# Altium PCB SAMD21J17A DEV BOARD.PcbDoc
Units mm, origin at the board's own origin, x right, y up, seen from the top; angles counter-clockwise.
Board outline 21 x 67.5 mm, 4 copper layers (Top Layer, GND, POWER, Bottom Layer), stack 0.603 mm thick; 30 components, 64 nets, 204 pads, 90 vias.
Unrouted connection lines stored in the file: 1.
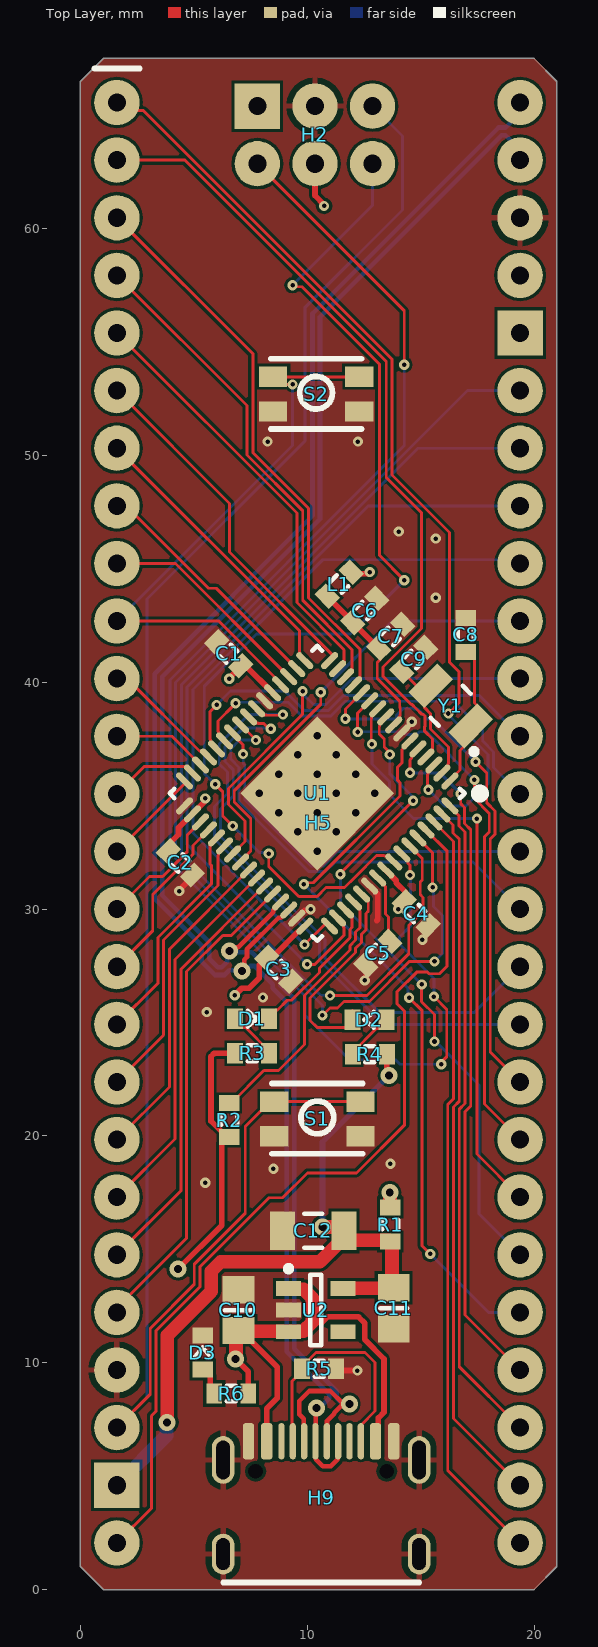
[diagram p0: Top Layer view]
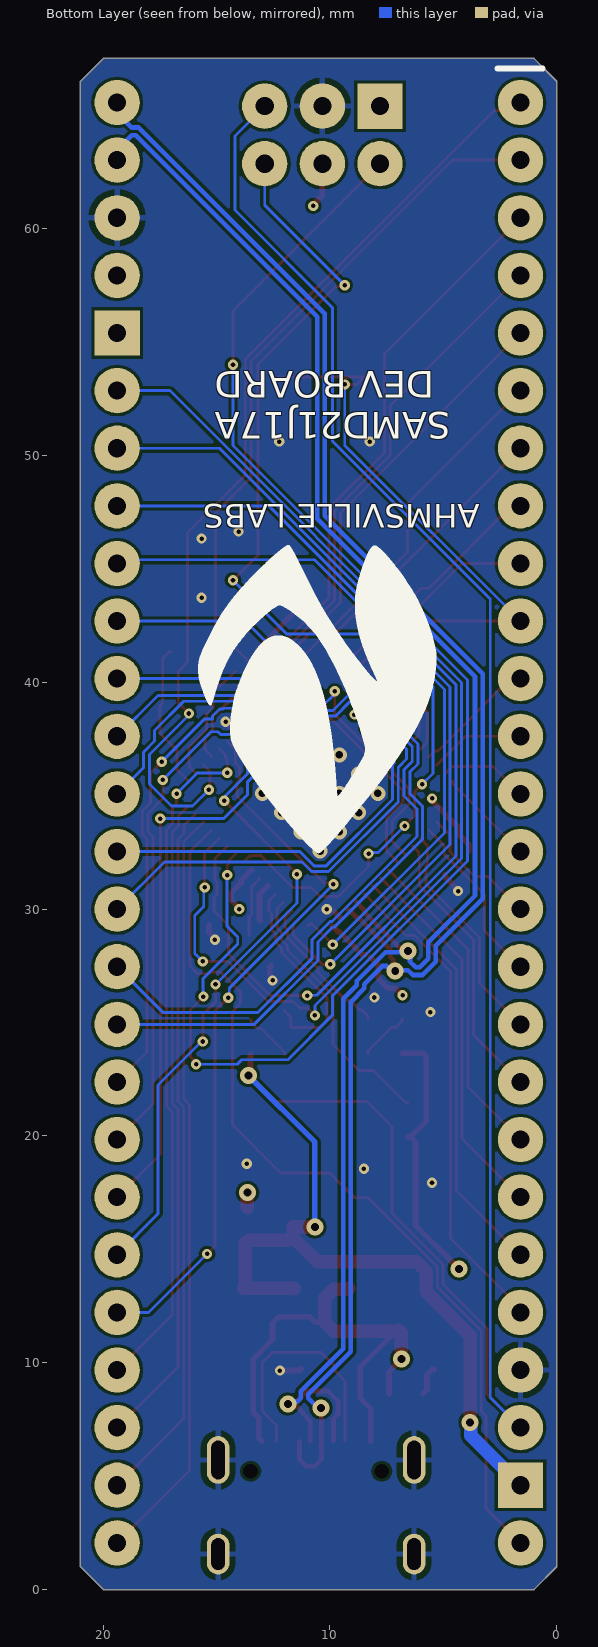
[diagram p1: Bottom Layer view, seen from below]
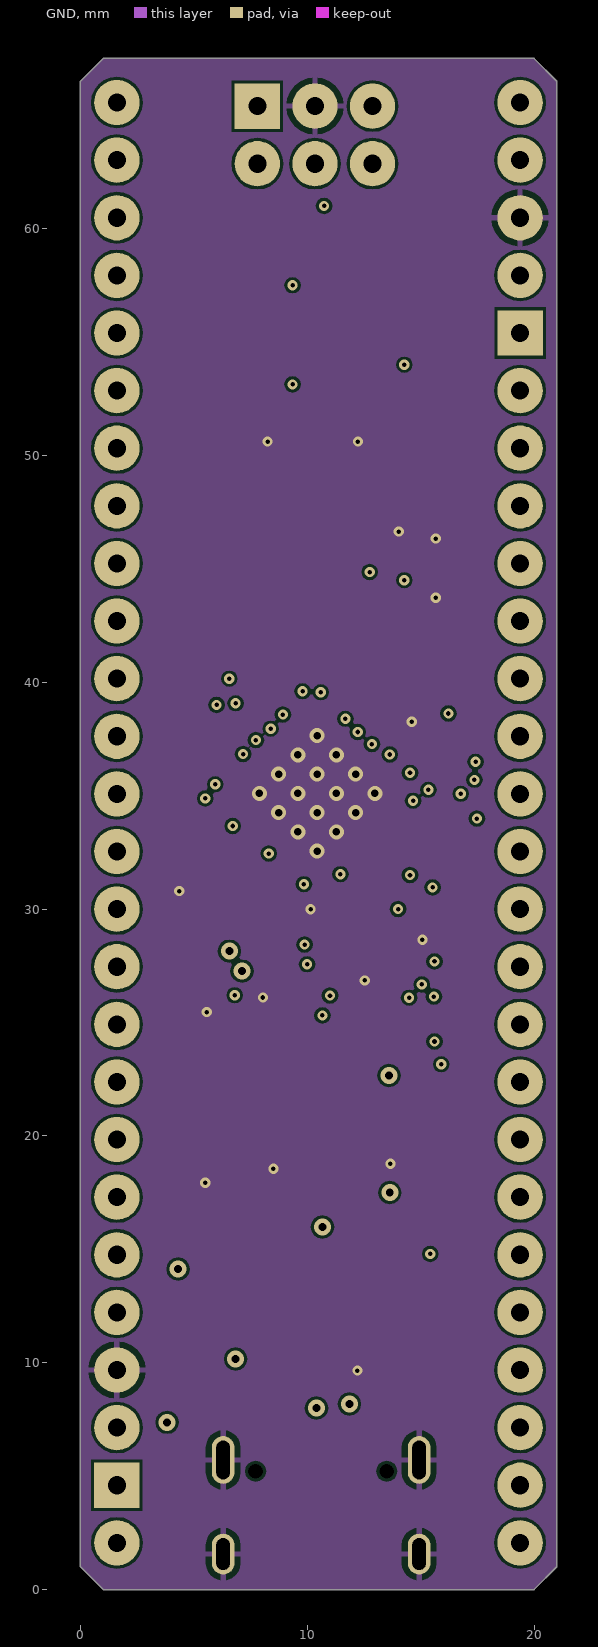
[diagram p2: GND]
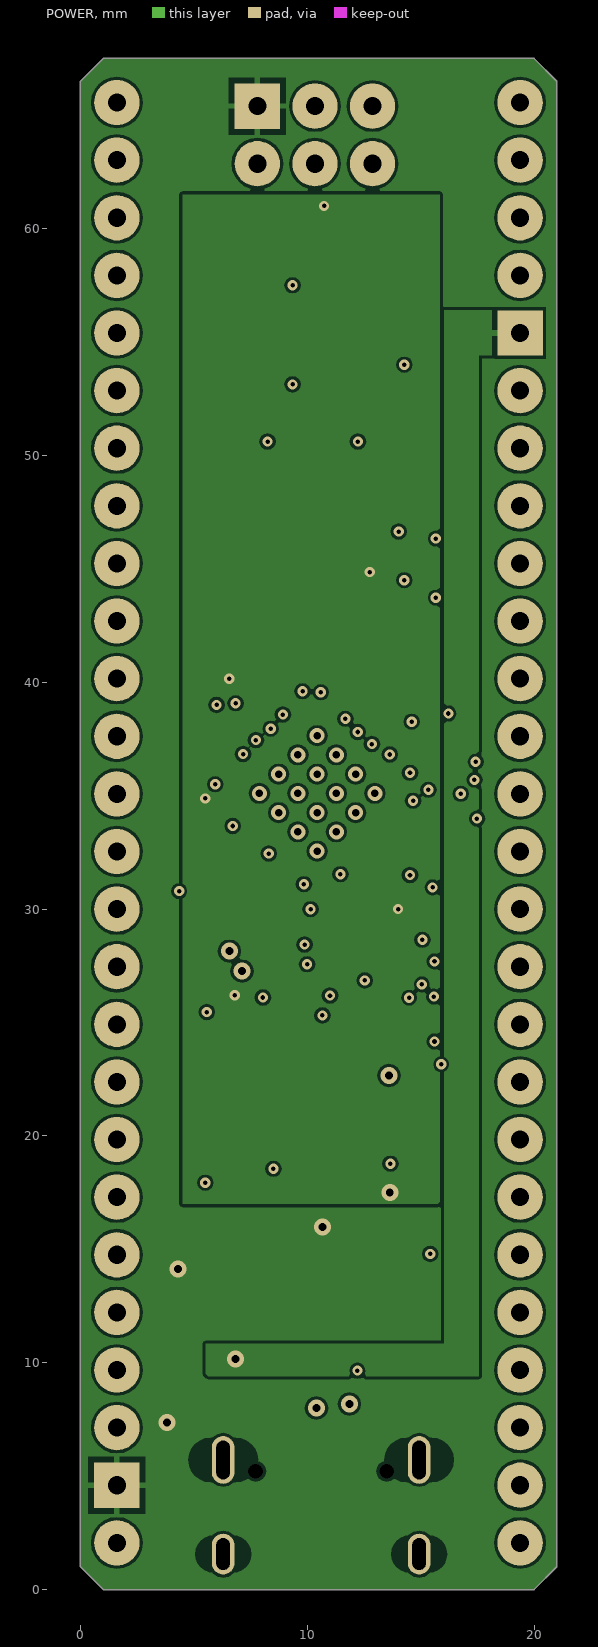
[diagram p3: POWER]
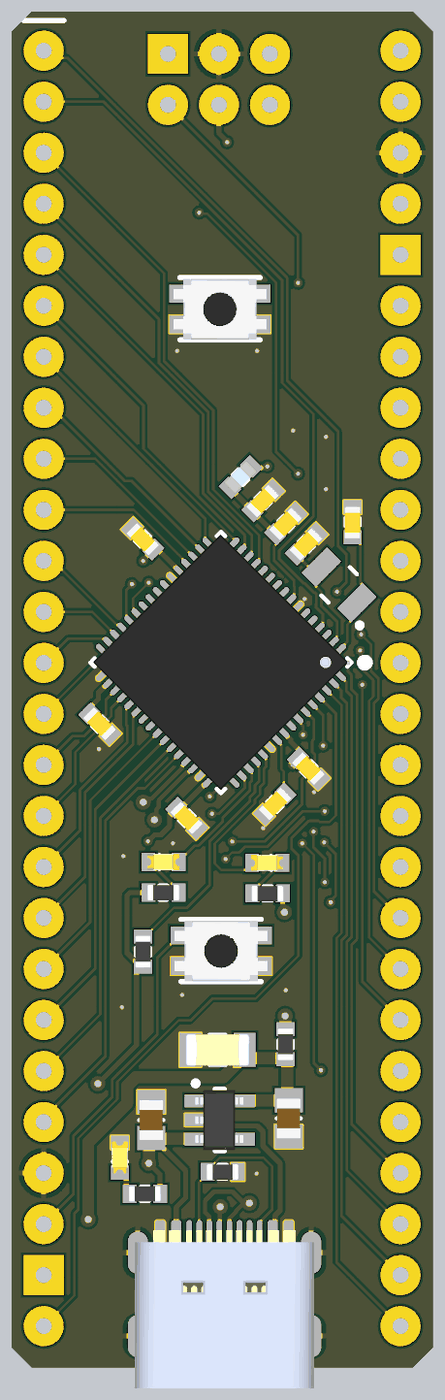
[diagram p4: 3D render of the assembled board from above, using the file's embedded part models]

## Layer stack, top to bottom
Top Solder: solder mask 0.0102, Solder Resist, Dk 3.5
Top Layer: signal copper 0.0356
Dielectric 2: prepreg 0.0711, PP-006, Dk 4.1
GND: signal copper 0.035
Dielectric 1: dielectric 0.32, FR-4, Dk 4.8
POWER: signal copper 0.035
Dielectric 3: prepreg 0.0711, PP-006, Dk 4.1
Bottom Layer: signal copper 0.0356
Bottom Solder: solder mask 0.0102, Solder Resist, Dk 3.5

## Board outline
0,1 0,66.5 1,67.5 20,67.5 21,66.5 21,1 20,0 1,0

## Design rules (kind name [scope] priority, off if disabled: settings)
Clearance [All] p1: gap=0.127 ignorepadtopadclearanceinfootprint=FALSE except(0.2: Arc-SMDPad Track-SMDPad; 0.254: Arc-THPad Arc-Via Track-THPad Track-Via Via-Via)
DiffPairsRouting [All] p1: maxlimit=0.254 minlimit=0.127 mostfreqgap=0.254 toplayer_maxgap=0.127 toplayer_prefgap=0.127 toplayer_minwidth=0.206 toplayer_maxwidth=0.206 toplayer_prefwidth=0.206 midlayer1_mingap=0.254 midlayer1_minwidth=0.381 midlayer1_maxwidth=0.381 midlayer1_prefwidth=0.381 midlayer2_mingap=0.254 midlayer2_minwidth=0.381 midlayer2_maxwidth=0.381 midlayer2_prefwidth=0.381 bottomlayer_maxgap=0.127 bottomlayer_prefgap=0.127 bottomlayer_minwidth=0.206 bottomlayer_maxwidth=0.206 bottomlayer_prefwidth=0.206 maxuncoupledlength=12.7
Height [All] p1: minheight=0 maxheight=40 prefheight=12.7
HoleSize [All] p1: absolutevalues=TRUE maxlimit=10 minlimit=0.2 maxpercent=80.000 minpercent=20.000
HoleToHoleClearance [All] p1: gap=0.54 allowstackedmicrovias=TRUE
MinimumAnnularRing [All] p1: minimumring=0.12
MinimumSolderMaskSliver [All] p1: minsoldermaskwidth=0.1
PlaneConnect [All] p1: pad.planeconnectstyle=Relief pad.reliefexpansion=0.508 pad.reliefentries=4 pad.reliefconductorwidth=0.254 pad.reliefairgap=0.254 via.planeconnectstyle=Direct via.reliefexpansion=0.508 via.reliefentries=4 via.reliefconductorwidth=0.254 via.reliefairgap=0.254
PolygonConnect [All] p1: thpad.connectstyle=Relief thpad.reliefconductorwidth=0.254 thpad.reliefentries=4 thpad.polygonreliefangle="90 Angle" thpad.airgapwidth=0.254 smdpad.connectstyle=Direct smdpad.reliefconductorwidth=0.254 smdpad.reliefentries=4 smdpad.polygonreliefangle="90 Angle" smdpad.airgapwidth=0.254 via.connectstyle=Direct via.reliefconductorwidth=0.254 via.reliefentries=4 via.polygonreliefangle="90 Angle" via.airgapwidth=0.254
RoutingVias "RoutingVias POWER" [InNet('VCC') or InNet('+5') or InNet('BAT+') or InNet('BAT-GND') or InNet('+5 USB') or InNet('+5-ANA') or InNet('+3.3-SW') or InNet('GND') or InNet('+3.3') or InNet('+12')] p1: holewidth=0.6 width=0.8 viastyle="Through Hole" minholewidth=0.2 minwidth=0.45 maxholewidth=0.8 maxwidth=1.27
RoutingVias [All] p2: holewidth=0.35 width=0.6 viastyle="Through Hole" minholewidth=0.2 minwidth=0.45 maxholewidth=0.35 maxwidth=0.75
SMDNeckDown [All] p1: percent=110.000
SilkToSolderMaskClearance [IsPad] p1: minsilkscreentomaskgap=0.1 clearancetoexposedcopper=TRUE
SolderMaskExpansion [All] p1: expansion=0.05
UnRoutedNet [All] p1: checkbadconnections=TRUE
Width Width-POWER [InNet('VCC') or InNet('+5') or InNet('BAT+') or InNet('BAT-GND') or InNet('+5 USB') or InNet('+5-ANA') or InNet('+3.3-SW') or InNet('GND') or InNet('+3.3') or InNet('+12')] p1: maxlimit=1.27 minlimit=0.2 preferedwidth=0.45 minimp=50.000000 maximp=50.000000 favimp=50.000000
Width [All] p2: maxlimit=0.6 minlimit=0.127 preferedwidth=0.254 minimp=50.000000 maximp=50.000000 favimp=50.000000
22 further rules are at their usual default settings.

## Classes and differential pairs
differential pair USB-D: +USB-D_P -USB-D_N

## Components (designator, comment, footprint, x,y, rotation, side; value= is the part's Value field where it differs from the comment)
C1 "Cap" "0603 cap" 5.541,40.737 r315 top value=0.1uF
C2 "Cap" "0603 cap" 5.396,32.552 r135 top value=0.1uF
C3 "Cap" "0603 cap" 9.725,27.86 r135 top value=0.1uF
C4 "Cap" "0603 cap" 15.795,30.325 r135 top value=0.1uF
C5 "Cap" "0603 cap" 13.636,27.056 r45 top value=0.1uF
C6 "Cap" "0603 cap" 12.016,44.151 r225 top value=10uF
C7 "Cap" "0603 cap" 13.159,43.008 r225 top value=0.1uF
C8 "Cap" "0603 cap" 15.922,42.42 r270 top value=15pF
C9 "Cap" "0603 cap" 14.175,41.992 r225 top value=15pF
C10 "Cap" "0805 cap" 6.962,12.32 r270 top value=10uF
C11 "Cap" "0805 cap" 13.811,12.4 r90 top value=10uF
C12 "Cap" "1206 CAP" 10.266,15.811 r0 top value=100uF
D1 "LED" "0603 LED" 7.567,25.164 r0 top
D2 "LED" "0603 LED" 12.735,25.119 r180 top
D3 "LED" "0603 LED" 5.396,10.448 r90 top
H2 "6PIN" "HEADER 6PIN DUAL PROG" 10.337,65.401 r0 top
H5 "SAMD21J17A HEADER" "HEADER 52PIN" 1.602,65.558 r0 top locked
H9 "USB TYPE C" "USB TYPE C" 10.76,6.311 r0 top
L1 "Inductor" "0603 IND" 11.411,44.328 r45 top value=30oh@100MHz
R1 "Res" "0603 res" 13.653,16.091 r90 top value="500ma fuse 0603"
R2 "Res" "0603 res" 6.552,20.699 r270 top value=10K
R3 "Res" "0603 res" 7.567,23.643 r180 top value=1K
R4 "Res" "0603 res" 12.758,23.598 r0 top value=1K
R5 "Res" "0603 res" 10.519,9.735 r0 top value=5.1K
R6 "Res" "0603 res" 6.648,8.641 r0 top value=1K
S1 "Push button" "PUSH BUTTON-3x4.65mm" 11.143,20.009 r180 top
S2 "Push button" "PUSH BUTTON-3x4.65mm" 11.088,51.963 r180 top
U1 "SAMD21J17A-AUT" QFN64_9x9 10.485,35.05 r225 top
U2 "HX9193" SOT23-5_N 10.373,12.319 r0 top
Y1 "32.768KHz" "SMD_3215 - CRYSTAL" 16.287,38.994 r135 top value=16MHz

## Footprints (in the part's own frame and the unit in brackets; to place one, negate y for a bottom-side part, rotate by r counter-clockwise, add the part's x,y. Pads: shape width x height; smd on the part's side, far side on the other; paste and mask are expansions set on the pad)
"0603 cap" [mm] "Chip capacitor, Body 1.6x0.8mm, IPC High Density"
  rect 0.7x0.9 smd: 1(-0.42,1.067) 2(1.08,1.067)
  silkscreen extent 0.13,0.72 0.53,1.42, body extent -0.44,0.67 1.16,1.47, height 0.86
"0603 IND" [mm] "Chip Inductor, Body 1.6x0.8mm, IPC High Density"
  rect 0.7x0.9 smd: 1(-0.75,0) 2(0.75,0)
  silkscreen extent -0.2,-0.35 0.2,0.35, body extent -0.8,-0.4 0.8,0.4, height 0.65
"0603 LED" [mm] "Chip led Body 1.6x0.7mm, IPC Medium Density"
  rect 0.7x0.9 smd: 1(-0.751,0) 2(0.749,0)
  silkscreen extent -0.2,-0.35 0.23,0.35, body extent -0.8,-0.4 0.8,0.4, height 0.6
"0603 res" [mm] "Chip Resistor, Body 1.6x0.8mm, IPC High Density"
  rect 0.7x0.9 smd: 1(-0.75,0) 2(0.75,0)
  silkscreen extent -0.2,-0.35 0.2,0.35, body extent -0.8,-0.4 0.8,0.4, height 0.9
"0805 cap" [mm] "Chip Resistor, Body 2.0x1.2mm, IPC Medium Density"
  rect 1.2x1.4 smd: 1(-0.9,0) 2(0.9,0)
  silkscreen extent 0,-0.6 0,0.6, body extent -1,-0.6 1,0.6, height 1.2
"1206 CAP" [mm] "Chip Capacitor, Body 3.2x1.6mm, IPC High Density"
  rect 1.1x1.7 smd: 1(-1.35,0) 2(1.35,0)
  silkscreen extent -0.4,-0.75 0.4,0.75, body extent -1.6,-0.8 1.6,0.8, height 0.94
"HEADER 6PIN DUAL PROG" [mm]
  rect 2x2 hole 0.8: 1(-2.54,0)
  round 2 hole 0.8: 2(0,0) 3(2.54,0) 4(-2.54,-2.54) 5(0,-2.54) 6(2.54,-2.54)
"HEADER 52PIN" [mm]
  round 2 hole 0.8: 1(0,0) 2(0,-2.54) 3(0,-5.08) 4(0,-7.62) 5(0,-10.16) 6(0,-12.7) 7(0,-15.24) 8(0,-17.78) 9(0,-20.32) 10(0,-22.86) 11(0,-25.4) 12(0,-27.94) 13(0,-30.48) 14(0,-33.02) 15(0,-35.56) 16(0,-38.1) 17(0,-40.64) 18(0,-43.18) 19(0,-45.72) 20(0,-48.26) 21(0,-50.8) 22(0,-53.34) 23(0,-55.88) 24(0,-58.42) 26(0,-63.5) 27(17.78,-63.5) 28(17.78,-60.96) 29(17.78,-58.42) 30(17.78,-55.88) 31(17.78,-53.34) 32(17.78,-50.8) 33(17.78,-48.26) 34(17.78,-45.72) 35(17.78,-43.18) 36(17.78,-40.64) 37(17.78,-38.1) 38(17.78,-35.56) 39(17.78,-33.02) 40(17.78,-30.48) 41(17.78,-27.94) 42(17.78,-25.4) 43(17.78,-22.86) 44(17.78,-20.32) 45(17.78,-17.78) 46(17.78,-15.24) 47(17.78,-12.7) 49(17.78,-7.62) 50(17.78,-5.08) 51(17.78,-2.54) 52(17.78,0)
  rect 2x2 hole 0.8: 25(0,-60.96) 48(17.78,-10.16)
  silkscreen extent -0.98,1.5 1.02,1.5
"PUSH BUTTON-3x4.65mm" [mm]
  rect 1.25x0.9 smd: 1(-1.2,0.025) 1(2.6,0.025) 2(-1.2,-1.5) 2(2.6,-1.5)
  silkscreen extent -1.3,-2.3 2.7,0.8, body extent -1.62,-2.22 3.03,0.78, height 1.8
QFN64_9x9 [mm] "QFN, 64-Leads, Body 9x9mm, Pitch 0.5mm, IPC Low Density"
  oval 0.95x0.28 smd: 1(-4.525,3.68) 2(-4.525,3.18) 3(-4.525,2.68) 4(-4.525,2.18) 5(-4.525,1.68) 6(-4.525,1.18) 7(-4.525,0.68) 8(-4.525,0.18) 9(-4.525,-0.32) 10(-4.525,-0.82) 11(-4.525,-1.32) 12(-4.525,-1.82) 13(-4.525,-2.32) 14(-4.525,-2.82) 15(-4.525,-3.32) 16(-4.525,-3.82) 33(4.525,-3.82) 34(4.525,-3.32) 35(4.525,-2.82) 36(4.525,-2.32) 37(4.525,-1.82) 38(4.525,-1.32) 39(4.525,-0.82) 40(4.525,-0.32) 41(4.525,0.18) 42(4.525,0.68) 43(4.525,1.18) 44(4.525,1.68) 45(4.525,2.18) 46(4.525,2.68) 47(4.525,3.18) 48(4.525,3.68)
  oval 0.28x0.95 smd: 17(-3.75,-4.595) 18(-3.25,-4.595) 19(-2.75,-4.595) 20(-2.25,-4.595) 21(-1.75,-4.595) 22(-1.25,-4.595) 23(-0.75,-4.595) 24(-0.25,-4.595) 25(0.25,-4.595) 26(0.75,-4.595) 27(1.25,-4.595) 28(1.75,-4.595) 29(2.25,-4.595) 30(2.75,-4.595) 31(3.25,-4.595) 32(3.75,-4.595) 49(3.75,4.455) 50(3.25,4.455) 51(2.75,4.455) 52(2.25,4.455) 53(1.75,4.455) 54(1.25,4.455) 55(0.75,4.455) 56(0.25,4.455) 57(-0.25,4.455) 58(-0.75,4.455) 59(-1.25,4.455) 60(-1.75,4.455) 61(-2.25,4.455) 62(-2.75,4.455) 63(-3.25,4.455) 64(-3.75,4.455)
  rect 4.8x4.8 smd: 65(0,-0.07)
  silkscreen extent -5.19,-4.67 4.6,5.13, body extent -4.51,-4.61 4.53,4.43, height 0.9
"SMD_3215 - CRYSTAL" [mm] "Surface Mount Quartz Crystal; Body 3.2 x 1.5 mm (LxW)"
  rect 1x1.8 smd: 1(-1.3,0) 2(1.2,0)
  silkscreen extent -2.32,-1 0.21,1
SOT23-5_N [mm] "SOT23, 5-Leads, Body 2.9x1.6mm, Pitch 0.95mm, Lead Span 2.8mm, IPC Medium Density"
  rect 1.1x0.65 smd: 1(-1.2,0.95) 2(-1.2,0) 3(-1.2,-0.95) 4(1.2,-0.95) 5(1.2,0.95)
  silkscreen extent -1.32,-1.55 0.25,1.95, body extent -1.23,-1.5 1.17,1.5, height 1.1
"USB TYPE C" [mm] "TYPE-C-31-M-14 / U262-161N-4BVC11"
  rrect50% 0.5x1.6 smd: 1(-3.35,0.225) 2(-2.55,0.225) 11(2.25,0.225) 12(3.05,0.225)
  oval 0.28x1.6 smd: 3(-1.9,0.225) 4(-1.4,0.225) 5(-0.9,0.225) 6(-0.4,0.225) 7(0.1,0.225) 8(0.6,0.225) 9(1.1,0.225) 10(1.6,0.225)
  oval 1x1.8 hole 1.4 slot 0.6 at 0 deg: 13(-4.469,-4.75) 13(4.171,-4.75)
  oval 1x2.1 hole 1.7 slot 0.6 at 0 deg: 13(-4.469,-0.6) 13(4.171,-0.6)
  rrect100% 1x2.1 on Top Paste: ""(-4.469,-4.75) ""(-4.469,-0.6) ""(4.171,-4.75) ""(4.171,-0.6)
  round 0 hole 0.65 unplated: ""(-3.04,-1.1) ""(2.74,-1.1)
  silkscreen extent -4.47,-6 4.17,-6, body extent -4.63,-7.38 4.31,0.52, height 3.2

## Part data
C1 C2 C3 C4 C5 C6 C7 C8 C9 C10 C11 C12: "Capacitor", LatestRevisionDate=17-Jul-2002, LatestRevisionNote="Re-released for DXP Platform.", PackageDescription="Radial Cap, Thru-Hole; 2 Leads; 0.3 in Pin Spacing", PackageReference=RAD-0.3, Published=8-Jun-2000, Publisher="Altium Limited"
  C1 C2 C3 C4 C5 C6 C7 C8 C9: Supplier 1=lcsc.com, Supplier 2=aliexpress.com, Supplier Unit Price 1=0.03, Supplier Unit Price 2=0.03
D1 D2 D3: "Typical BLUE SiC LED", DatasheetVersion=16-Apr-2002, LatestRevisionDate=17-Dec-2003, LatestRevisionNote="PCB Footprint replaced.", PackageDescription="SM LED; 2 C-Bend Leads; Body 3.5 x 2.8 x 1.9 mm, inc leads (LxWxH typ)", PackageReference=3.5X2.8X1.9, PackageVersion=16-Apr-2002, Published=8-Jun-2000, Publisher="Altium Limited"
H2: "Header 6PIN", LatestRevisionDate=17-Jul-2002, LatestRevisionNote="Re-released for DXP Platform.", Publisher="Altium Limited"
H9: "USB TYPE C 12 PIN", LatestRevisionDate=17-Jul-2002, LatestRevisionNote="Re-released for DXP Platform.", Publisher="Altium Limited"
L1: library part "Ferrite Bead", "Decoupling/filtering inductor", Code_IEC=1005, Code_JEITA=0402, LatestRevisionDate=29-May-2009, LatestRevisionNote="IPC-7351 Footprint Added.", PackageDescription="Chip Inductor", PackageReference=0402-A, Published=8-Jun-2000, Publisher="Altium Limited", Supplier 1=lcsc.com, Supplier 2=aliexpress.com, Supplier Unit Price 1=0.1, Supplier Unit Price 2=0.1, Type="Ferrite Bead"
R1 R2 R3 R4 R5 R6: "Resistor", LatestRevisionDate=17-Jul-2002, LatestRevisionNote="Re-released for DXP Platform.", PackageDescription="Axial Device, Thru-Hole; 2 Leads; 0.4 in Pin Spacing", PackageReference=AXIAL-0.4, Published=8-Jun-2000, Publisher="Altium Limited", Supplier 1=lcsc.com, Supplier 2=aliexpress.com, Supplier Unit Price 1=0.0046, Supplier Unit Price 2=0.01
S1 S2: "Push button (C318895)", LatestRevisionDate=17-Jul-2002, LatestRevisionNote="Re-released for DXP Platform.", PackageDescription="Switch; 2 Leads", PackageReference=SPST-2, Published=24-Mar-1999, Publisher="Altium Limited"
U1: "Low-Power, 32-bit Cortex-M0+ MCU with Advanced Analog / and PWM"
U2: "3.3V Fixed Output Voltage Regulator"
Y1: library part "XTAL 2p", "Crystal", LatestRevisionDate=17-Jul-2002, LatestRevisionNote="Re-released for DXP Platform.", PackageDescription="Crystal, Thru-Hole; 2 Leads; Body 3.1 x 8.2 mm (Dia.xH)", PackageReference=R38, Published=8-Jun-2000, Publisher="Altium Limited", Supplier 1=lcsc.com, Supplier 2=aliexpress.com, Supplier Unit Price 1=0.1, Supplier Unit Price 2=0.1

## Via types
v1: diameter 0.45, hole 0.2, Top Layer to Bottom Layer, tented both sides, 64 vias
v2: diameter 0.66, hole 0.33, Top Layer to Bottom Layer, tented both sides, 16 vias
v3: diameter 0.75, hole 0.35, Top Layer to Bottom Layer, tented both sides, 10 vias

## Nets (pads, with @x,y where several pads share a name; then routed paths per layer and width w, separated by ;. In a path a pad name is that pad's centre, name@x,y a point inside that pad or via, vN(x,y) a via of type N, cw(c..) or ccw(c..) an arc to the next point about the centre after c; other vN are vias at no path point)
+3.3: C11.2 C12.2 H2.1 H5.25 R1.1 R2.2 R3.2 R4.2 U2.5 | length 45.7
  Top Layer w0.25: v3(4.304,14.127) 6.227,16.051 6.227,19.724 R2.2@6.452,19.949 ; R2.2 R2.2@6.452,19.949 ; R3.2 5.898,23.643 5.752,23.496 5.752,20.65 R2.2@6.452,19.949 ; R4.2 13.508,22.755 v3(13.6,22.662)
  Top Layer w0.6: v3(3.821,7.371) 3.821,11.202 5.762,13.143 5.762,14.027 6.186,14.451 10.556,14.451 11.616,15.511 C12.2 ; v3(10.667,15.982) C12.2@11.643,15.982 ; U2.5 11.588,13.285 13.795,13.285 C11.2 13.732,13.379 13.732,15.291 13.682,15.341 R1.1 13.603,15.391 C12.2@11.866,15.391
  Bottom Layer w0.25: v3(10.667,15.982) 10.667,19.729 v3(13.6,22.662)
  Bottom Layer w0.6: H5.25 3.793,6.788 3.793,7.342 v3(3.821,7.371)
+3.3-FUSED: C1.2 C2.2 C3.2 C4.2 H2.5 L1.2 R1.2 U1.21 U1.34 U1.48 U1.56 | length 15.9
  Top Layer w0.25: C2.2 3.878,32.841 4.322,33.285 4.322,33.582 U1.34 4.938,34.206 5.462,34.73 5.462,34.838 v1(5.5,34.876) ; v1(6.562,40.158) 6.562,40.194 7.059,40.691 C1.2 7.282,40.727 U1.21 ; v1(6.8,26.2) 7.11,26.51 7.436,26.51 7.878,26.952 7.878,27.54 C3.2 ; C3.2@8.473,27.973 8.563,27.973 9.595,29.005 9.645,29.005 U1.48 ; U1.56 13.458,31.715 13.923,31.25 13.923,31.147 14.347,30.723 14.347,30.405 C4.2 14.277,30.304 14,30.028 v1(14,29.998)
  Top Layer w0.254: H2.5 10.337,61.455 10.738,61.053 v1(10.738,61) ; L1.2 12.012,44.788 12.627,44.788 12.698,44.858 v1(12.751,44.858)
  Top Layer w0.6: v3(13.636,17.5) 13.644,17.491 13.644,16.849 R1.2
+5: C10.2 H5.48 H9.2 H9.11 R6.2 U2.1 U2.3 | length 22.7
  Top Layer w0.25: v3(6.84,10.165) 7.398,9.607 R6.2 ; C10.2 7.062,11.42 7.087,11.394 8.673,9.809 8.673,8.438 8.21,7.975 H9.2 ; 10.223,11.787 10.656,11.787 10.888,12.019 12.258,12.019 12.531,11.746 12.531,11.02 13.385,10.166 13.385,7.817 13.135,7.567 13.135,6.661 H9.11
  Top Layer w0.6: v3(6.84,10.165) 6.858,10.183 6.858,11.316 C10.2 ; C10.2@7.087,11.394 9.148,11.394 U2.3 9.198,11.394 9.83,11.394 10.223,11.787 10.223,12.851 9.83,13.244 9.198,13.244 U2.1
GND: C1.1 C2.1 C3.1 C4.1 C5.1 C6.1 C7.1 C8.1 C9.1 C10.1 C11.1 C12.1 D3.2 H2.2 H5.23 H5.50 H9.1 H9.12 H9.13 R5.2 S1.1 S2.1 U1.7 U1.22 U1.33 U1.47 U1.54 U1.65 U2.2 | length 6.5
  Top Layer w0.25: v1(4.355,30.79) 4.355,30.844 4.939,31.428 C2.1 ; U1.47 9.542,29.602 9.894,29.954 10.104,29.954 v1(10.142,29.992) ; R5.2 11.351,9.653 v1(12.21,9.653) ; v1(12.534,26.853) 12.572,26.891 12.572,27.041 12.655,27.124 12.655,27.442 C5.1 ; U1.54 12.751,31.008 13.105,30.654 13.105,29.537 13.062,29.494 ; U1.7 14.165,37.777 14.602,38.214 v1(14.602,38.26) ; v1(15.074,28.645) 15.074,28.699 15.337,28.962 C4.1
  other v1: 5.502,17.937 8.505,18.549 13.666,18.776 5.57,25.458 8.042,26.1 15.662,43.727 15.662,46.336 14.031,46.641 8.25,50.612 12.233,50.612
  other v2: 10.435,32.554 9.587,33.402 11.284,33.402 8.738,34.251 10.435,34.251 12.132,34.251 7.89,35.099 9.587,35.099 11.284,35.099 12.981,35.099 8.738,35.948 10.435,35.948 12.132,35.948 9.587,36.796 11.284,36.796 10.435,37.645
IO1: H5.1 U1.3 | length 42.3
  Top Layer w0.127: H5.1 1.961,65.199 2.776,65.199 13.734,54.241 13.734,49.138 16.275,46.597 16.275,40.881 16.692,40.465 16.692,39.093 v1(16.22,38.622) ; v1(15.338,35.258) 15.293,35.303 15.293,35.931 15.313,35.952 15.313,36.088 U1.3
  Bottom Layer w0.127: v1(15.338,35.258) 16.059,34.537 16.99,34.537 17.961,35.509 17.961,36.817 16.22,38.558 v1(16.22,38.622)
IO2: H5.2 U1.4 | length 35.4
  Top Layer w0.127: H5.2 4.598,63.018 13.48,54.136 13.48,49.033 15.039,47.473 15.039,42.37 13.336,40.667 13.336,40.265 14.57,39.032 14.603,39.032 14.81,38.825 15.046,38.589 15.103,38.589 15.184,38.508 15.184,38.058 15.174,38.048 15.174,37.838 15.513,37.499 15.513,37.036 15.226,36.749 U1.4
IO3: H5.3 U1.13 | length 25.2
  Top Layer w0.127: H5.3 7.599,54.481 7.599,50.119 10.051,47.667 10.051,43.72 12.331,41.44 12.331,40.218 12.044,39.931 U1.13
IO4: H5.4 U1.14 | length 22.1
  Top Layer w0.127: H5.4 7.345,52.195 7.345,50.014 9.797,47.562 9.797,43.614 11.977,41.435 11.977,40.572 11.69,40.285 U1.14
IO5: H5.5 U1.15 | length 19.1
  Top Layer w0.127: H5.5 9.543,47.457 9.543,43.509 11.624,41.429 11.624,40.925 11.337,40.638 U1.15
IO6: H5.6 U1.16 | length 15.9
  Top Layer w0.127: H5.6 6.576,47.884 6.576,45.742 11.125,41.193 11.125,41.093 U1.16
IO7: H5.7 U1.17 | length 12.8
  Top Layer w0.127: H5.7 9.65,42.27 9.65,41.188 U1.17
IO8: H5.8 U1.18 | length 10.9
  Top Layer w0.127: H5.8 2.005,47.778 5.642,44.141 5.99,44.141 U1.18
IO9: H5.9 U1.19 | length 9.6
  Top Layer w0.127: H5.9 4.186,45.238 U1.19
IO10: H5.10 S2.2 U1.20 | length 26.9
  Top Layer w0.127: H5.10 6.097,42.698 8.561,40.235 8.561,40.156 U1.20 ; v1(9.349,53.132) 8.818,53.132 8.488,53.463 S2.2@12.288,53.463
  Bottom Layer w0.127: H5.10 9.349,50.444 v1(9.349,53.132)
IO11: H5.11 U1.29 | length 5.5
  Top Layer w0.127: H5.11 2.058,40.158 5.242,36.974 5.379,36.974 U1.29
IO12: H5.12 U1.30 | length 4.2
  Top Layer w0.127: H5.12 4.028,37.618 U1.30
IO13: H5.13 U1.31 | length 4
  Top Layer w0.127: H5.13 2.812,36.288 4.609,36.288 4.896,36.001 U1.31
IO14: H5.14 U1.32 | length 4.4
  Top Layer w0.127: H5.14 4.598,35.533 4.598,35.633 U1.32
IO15: H5.15 U1.35 | length 5.7
  Top Layer w0.127: H5.15 3.044,31.44 3.624,31.44 4.708,32.523 4.708,33.261 U1.35
IO16: H5.16 U1.36 | length 7.7
  Top Layer w0.127: H5.16 3.186,29.042 3.186,30.643 4.962,32.418 4.962,32.807 U1.36
IO17: H5.17 U1.37 | length 10.1
  Top Layer w0.127: H5.17 3.411,26.726 3.411,28.746 5.768,31.103 5.768,31.928 5.711,31.985 5.711,32.809 5.998,33.096 U1.37
IO18: H5.18 U1.38 | length 12.4
  Top Layer w0.127: H5.18 3.665,24.44 3.665,28.641 6.065,31.041 6.065,32.36 6.086,32.381 6.086,32.517 U1.38
IO19: H5.19 U1.41 | length 14.3
  Top Layer w0.127: H5.19 3.919,22.154 3.919,28.229 U1.41
IO20: H5.20 U1.42 | length 16.6
  Top Layer w0.127: H5.20 4.173,19.868 4.173,27.776 U1.42
IO21: H5.21 U1.43 | length 19
  Top Layer w0.127: H5.21 4.427,17.582 4.427,27.347 8.095,31.016 U1.43
IO22: H5.22 U1.44 | length 21.5
  Top Layer w0.127: H5.22 1.602,12.405 4.681,15.483 4.681,27.242 6.275,28.837 6.648,28.837 U1.44
IO23: H5.26 U1.61 | length 40.4
  Top Layer w0.127: H5.26 3.129,3.584 3.129,7.658 3.331,7.86 3.331,11.409 5.271,13.35 5.271,14.23 8.314,17.272 8.911,17.272 10.008,18.369 12.175,18.369 14.293,20.487 14.293,25.485 13.947,25.831 13.947,26.341 14.823,27.218 15.293,27.218 15.362,27.149 15.832,27.149 16.166,27.483 16.166,32.55 U1.61
IO24: H5.27 U1.62 | length 33.6
  Top Layer w0.127: U1.62 16.445,32.979 16.445,21.635 16.191,21.381 16.191,5.249 H5.27
IO25: H5.28 U1.63 | length 31.2
  Top Layer w0.127: U1.63 16.429,33.702 16.429,33.354 16.699,33.084 16.699,21.53 16.445,21.276 16.445,7.535 H5.28
IO26: H5.29 U1.64 | length 28.9
  Top Layer w0.127: U1.64 16.287,34.51 16.683,34.114 16.683,33.661 16.953,33.391 16.953,21.424 16.699,21.17 16.699,9.821 H5.29
IO27: H5.30 U1.5 | length 30.5
  Top Layer w0.127: v1(14.527,36.006) 14.527,36.58 14.606,36.659 14.606,36.795 U1.5 ; v1(16.765,35.08) 16.765,34.644 16.937,34.472 16.937,33.767 17.207,33.496 17.207,21.319 16.953,21.065 16.953,12.107 H5.30
  Bottom Layer w0.127: v1(14.527,36.006) 15.839,36.006 v1(16.765,35.08)
IO28: H5.31 U1.6 | length 32.2
  Top Layer w0.127: v1(9.85,31.096) 9.912,31.158 10.261,31.158 14.093,34.99 14.093,35.571 13.985,35.679 13.985,36.259 14.178,36.453 14.178,37.033 14.519,37.374 U1.6 ; v1(14.489,26.091) 15.064,25.516 15.064,15.15 v1(15.417,14.797)
  Bottom Layer w0.127: v1(9.85,31.096) 14.441,26.506 14.441,26.14 v1(14.489,26.091) ; v1(15.417,14.797) 17.996,12.218 H5.31
IO29: H5.32 U1.9 | length 29
  Top Layer w0.127: v1@11.473,31.587 v1(14.663,34.778) ; U1.9 13.192,38.21 13.192,38.073 13.171,38.052 13.171,37.718 13.392,37.497 13.392,37.145 13.636,36.902 v1(13.636,36.815) ; v1(15.048,26.675) 15.039,26.666 15.039,25.917 15.607,25.349 v1(15.607,24.16)
  Bottom Layer w0.127: v1(11.459,31.535) 11.459,30.264 v1(15.048,26.675) ; v1(13.636,36.815) 13.636,35.965 14.663,34.937 v1(14.663,34.778) ; v1(15.607,24.16) 15.665,24.16 17.576,22.25 17.576,16.565 H5.32
IO30: H5.33 U1.10 | length 26
  Top Layer w0.127: v1(12.85,37.273) 12.818,37.305 12.818,38.406 12.839,38.427 12.839,38.563 U1.10 ; v1(17.479,33.991) 17.479,19.201 H5.33
  Bottom Layer w0.127: v1(12.85,37.273) 12.85,36.392 13.628,35.613 13.628,35.045 14.682,33.991 v1(17.479,33.991)
IO31: H5.34 U1.11 | length 24.6
  Top Layer w0.127: v1(12.221,37.807) 12.221,38.648 12.751,39.179 U1.11 ; v1(17.37,35.696) 17.37,34.868 18.022,34.216 18.022,33.4 17.811,33.189 17.811,21.409 H5.34
  Bottom Layer w0.127: v1(12.221,37.807) 12.229,37.815 14.19,37.815 14.239,37.766 14.29,37.766 14.366,37.69 14.816,37.69 14.941,37.815 15.251,37.815 v1(17.37,35.696)
IO32: H5.35 U1.12 | length 23.6
  Top Layer w0.127: v1(11.678,38.387) 11.678,38.817 U1.12 ; v1(17.418,36.493) 17.912,35.999 17.912,34.685 18.276,34.321 18.276,33.294 18.065,33.084 18.065,23.695 H5.35
  Bottom Layer w0.127: v1(11.678,38.387) 13.921,38.387 13.921,38.533 14.239,38.851 14.689,38.851 14.714,38.825 14.867,38.825 15.184,38.508 15.184,38.387 15.524,38.387 v1(17.418,36.493)
IO33: H5.36 U1.23 | length 26.5
  Top Layer w0.127: U1.23 8.032,38.563 8.169,38.563 8.189,38.542 8.804,38.542 v1@8.879,38.617
  Bottom Layer w0.127: v1(8.923,38.574) 7.42,38.574 6.117,37.27 6.117,36.4 6.48,36.036 6.48,35.089 5.914,34.523 5.914,33.094 9.812,29.196 9.882,29.196 10.531,28.547 10.531,27.729 13.342,24.918 H5.36
IO34: H5.37 U1.24 | length 25.7
  Top Layer w0.127: U1.24 7.679,38.21 7.815,38.21 7.836,38.189 8.064,38.189 8.3,37.953 v1(8.388,37.953)
  Bottom Layer w0.127: v1(8.388,37.953) 8.35,37.991 7.196,37.991 6.371,37.165 6.371,36.505 6.734,36.142 6.734,34.984 6.168,34.418 6.168,33.199 9.917,29.45 9.988,29.45 10.785,28.652 10.785,27.834 13.172,25.447 17.371,25.447 H5.37
IO35: H5.38 U1.25 | length 19.4
  Top Layer w0.127: U1.25 v1(7.733,37.448)
  Bottom Layer w0.127: v1(7.733,37.448) 7.013,37.448 6.625,37.06 6.625,36.61 6.988,36.247 6.988,34.726 10.062,31.652 10.809,31.652 11.234,32.078 17.303,32.078 H5.38
IO36: H5.39 U1.26 | length 16.8
  Top Layer w0.127: U1.26 6.705,37.709 7.167,37.247 v1(7.167,36.835)
  Bottom Layer w0.127: v1(7.167,36.835) 7.175,36.828 7.175,36.42 7.242,36.352 7.242,34.831 10.167,31.906 10.704,31.906 11.335,32.538 H5.39
IO37: H5.40 U1.27 | length 17.5
  Top Layer w0.127: U1.27 6.086,37.681 6.086,37.818 6.065,37.838 6.065,38.298 v1@6.777,39.01
  Bottom Layer w0.127: v1(6.84,39.073) 6.883,39.116 9.148,39.116 9.76,38.504 11.028,38.504 11.688,39.164 16.445,39.164 17.735,37.875 17.735,37.403 18.215,36.922 18.215,36.245 H5.40
IO38: H5.41 U1.28 | length 17.2
  Top Layer w0.127: U1.28 5.732,37.328 5.732,37.464 5.711,37.485 5.711,38.701 6,38.989 v1(6,39)
  Bottom Layer w0.127: v1(6,39) 6.615,39.615 9.008,39.615 9.865,38.758 10.923,38.758 11.583,39.418 17.582,39.418 H5.41
IO39: H5.42 U1.39 | length 19.4
  Top Layer w0.127: U1.39 7.253,32.977 7.253,33.886 6.524,34.615 6.524,35.322 9.79,38.587 v1(9.79,39.601)
  Bottom Layer w0.127: v1(9.79,39.601) 9.851,39.539 9.851,39.43 10.269,39.012 10.818,39.012 11.963,40.158 H5.42
IO40: H5.43 U1.40 | length 19.6
  Top Layer w0.127: U1.40 7.059,32.118 7.507,32.566 7.507,33.991 6.778,34.72 6.778,35.216 10.593,39.032 v1(10.593,39.555)
  Bottom Layer w0.127: v1(10.593,39.555) 13.736,42.698 H5.43
IO41: H5.44 U1.49 | length 31.7
  Top Layer w0.127: v1(9.877,28.433) 10.788,29.344 10.888,29.344 U1.49
  Bottom Layer w0.127: v1@9.884,28.427 4.957,33.353 4.957,39.68 10.679,45.401 19.219,45.401 H5.44
IO42: H5.45 U1.50 | length 35.4
  Top Layer w0.127: v1(9.989,27.564) 10.344,27.564 11.624,28.844 11.624,29.178 11.603,29.199 11.603,29.335 U1.50
  Bottom Layer w0.127: v1(9.989,27.564) 9.98,27.564 4.703,32.84 4.703,39.785 12.696,47.778 H5.45
IO43: H5.46 U1.59 | length 45.5
  Top Layer w0.127: v1(11,26.185) 12.633,26.185 14.474,28.026 14.474,29.278 15.106,29.91 15.106,30.514 14.982,30.638 14.982,31.188 15.07,31.275 15.07,32.233 U1.59
  Bottom Layer w0.127: v1(11,26.185) 10.984,26.201 10.584,26.201 4.449,32.336 4.449,39.89 14.877,50.318 H5.46
IO44: H5.47 U1.60 | length 49.8
  Top Layer w0.127: v1(10.667,25.312) 10.998,25.643 11.336,25.643 11.625,25.931 12.738,25.931 14.492,27.684 15.6,27.684 v1(15.607,27.691) ; U1.60 15.524,32.485 v1(15.524,30.954)
  Bottom Layer w0.127: v1(10.667,25.312) 10.667,25.751 4.195,32.222 4.195,39.995 17.058,52.858 H5.47 ; v1(15.524,30.954) 15.566,30.913 15.566,30.118 15.962,29.722 15.962,28.046 v1(15.607,27.691)
NetC5_2: C5.2 U1.55 | length 2.7
  Top Layer w0.127: U1.55 13.105,31.328 13.447,30.985 13.447,29.783 13.574,29.656 13.574,28.846 C5.2@13.56,28.832
NetC6_2: C6.2 C7.2 L1.1 U1.8 | length 7.2
  Top Layer w0.127: C7.2 13.22,41.419 13.22,41.013 13.082,40.876 13.082,40.16 14.078,39.164 14.078,38.9 14.099,38.88 14.099,38.546 14.078,38.525 14.078,38.486 14.048,38.457 14.048,38.359 U1.8
  Top Layer w0.25: L1.1 10.881,43.778 12.006,42.652 C6.2 C7.2
NetC8_2: C8.2 U1.1 Y1.1 | length 6.5
  Top Layer w0.127: U1.1 16.287,35.686 16.738,36.137 16.738,36.989 17.489,37.74 17.489,38.975 17.375,39.088 17.375,41.054 17.089,41.34 C8.2
NetC9_2: C9.2 U1.2 Y1.2 | length 6.1
  Top Layer w0.127: C9.2 14.19,40.473 14.821,39.843 Y1.2 15.155,39.56 15.155,38.896 15.438,38.613 15.438,37.953 15.428,37.943 16.22,37.151 16.22,36.424 16.199,36.404 16.199,36.267 U1.2
NetD1_1: D1.1 R3.1 | length 2.2
  Top Layer w0.127: D1.1 6.817,25.064 7.103,24.777 7.283,24.777 8.317,23.743 R3.1
NetD1_2: D1.2 U1.51 | length 6.6
  Top Layer w0.127: D1.2 8.317,25.264 8.603,25.55 8.689,25.55 9.118,25.98 9.306,25.98 10.531,27.205 10.531,27.393 11.878,28.739 11.878,29.098 11.977,29.198 11.977,29.627 11.69,29.914 U1.51
NetD2_1: D2.1 R4.1 | length 2.2
  Top Layer w0.127: R4.1 12.008,23.698 13.043,24.733 13.199,24.733 13.486,25.02 D2.1
NetD2_2: D2.2 U1.53 | length 9.3
  Top Layer w0.127: D2.2@12.005,25.52 12.005,25.506 11.732,25.233 11.732,24.802 11.699,24.77 10.442,24.77 10.125,25.087 10.125,26.08 12.132,28.087 12.132,28.274 12.386,28.528 12.386,28.888 12.585,29.087 12.585,29.805 12.684,29.905 12.684,30.375 U1.53
NetD3_1: D3.1 R6.1 | length 1.3
  Top Layer w0.25: D3.1 5.496,9.698 5.721,9.473 5.721,8.817 R6.1
NetH9_4: H9.4 H9.10 R5.1 | length 10.9
  Top Layer w0.127: H9.4 9.333,6.563 9.333,9.199 9.769,9.635 R5.1 9.769,9.835 10.382,10.448 12.548,10.448 12.988,10.008 12.988,7.866 12.36,7.238 H9.10
NetR2_1: R2.1 U1.52 | length 11.8
  Top Layer w0.127: R2.1 6.652,21.449 8.083,22.88 8.727,22.88 9.871,24.023 9.871,26.185 11.878,28.192 11.878,28.38 12.132,28.634 12.132,28.993 12.331,29.192 12.331,29.885 12.31,29.906 12.31,30.043 U1.52
RESET: H2.3 H5.24 S1.2 | length 85.2
  Top Layer w0.127: H5.24 3.077,8.612 3.077,11.514 5.017,13.455 5.017,14.344 7.266,16.593 7.266,20.408 8.368,21.509 8.543,21.509 S1.2@12.343,21.509
  Bottom Layer w0.127: H5.24 2.933,8.469 2.933,43.67 9.891,50.627 9.891,56.513 14.194,60.816 14.194,64.083 H2.3
SWCLK: H2.6 U1.57 | length 49.1
  Top Layer w0.127: v1(5.938,35.5) 6.27,35.168 6.27,34.102 v1(6.71,33.661) ; v1(8.301,32.447) 8.301,31.879 9.626,30.554 10.435,30.554 10.83,30.949 11.64,30.949 12.111,31.42 13.054,32.363 13.388,32.363 13.409,32.343 13.546,32.343 U1.57 ; v1(9.349,57.5) 9.411,57.438 9.76,57.438 13.176,54.022 13.176,45.6 v1(14.277,44.5)
  Bottom Layer w0.127: v1(5.938,35.5) 5.457,35.98 5.457,39.82 7.766,42.129 11.906,42.129 v1(14.277,44.5) ; v1(6.71,33.661) 7.886,32.486 8.262,32.486 v1(8.301,32.447) ; v1(9.349,57.5) 12.877,61.028 H2.6
SWDIO: H2.4 U1.58 | length 64.5
  Top Layer w0.127: H2.4 14.277,56.381 v1(14.277,54) ; U1.58 14.431,32.164 14.431,32.027 14.527,31.932 v1(14.527,31.5) ; v1(15.582,26.142) 16.15,25.574 16.15,23.49 15.903,23.243 v1(15.903,23.156)
  Bottom Layer w0.127: v1(14.277,54) 14.277,50.436 3.941,40.101 3.941,32.117 9.898,26.161 9.898,25.315 11.858,23.354 13.887,23.354 14.086,23.156 v1(15.903,23.156) ; v1(14.527,31.5) 14.543,31.485 14.543,29.24 14.067,28.765 14.067,28.464 15.591,26.94 15.591,26.289 v1@15.443,26.142
USB-D_N: H5.51 H9.5 H9.7 U1.45 | length 79
  Top Layer w0.206: v3(6.562,28.144) 6.709,28.144 6.878,28.313 6.949,28.313 8.495,29.858 8.495,29.957 8.827,30.289 U1.45 ; H9.5 9.846,6.551 9.846,7.52 9.648,7.718 9.648,8.311 10.09,8.753 11.007,8.753 v3@11.579,8.181 ; H9.7 10.866,6.542 10.866,7.427 11.186,7.747 11.186,7.788 v3@11.579,8.181 ; v3(11.854,8.181) v3@11.579,8.181
  Bottom Layer w0.206: v3(11.854,8.181) 11.75,8.285 11.442,8.285 11.295,8.432 11.295,8.74 9.419,10.615 9.419,26.038 8.815,26.642 8.815,26.829 7.553,28.091 6.615,28.091 v3(6.562,28.144) 6.471,28.054 6.471,27.68 6.221,27.429 6.05,27.429 5.673,27.806 5.673,28.528 3.604,30.597 3.604,40.24 10.562,47.198 10.562,56.116 18.567,64.121 18.738,64.121 19.382,63.477 H5.51
USB-D_P: H5.52 H9.6 H9.8 U1.46 | length 77.6
  Top Layer w0.206: v3(7.124,27.264) 7.214,27.355 7.214,27.762 7.338,27.885 7.338,28.231 8.73,29.623 8.828,29.623 9.16,29.955 U1.46 ; v3@10.366,8.205 10.374,8.196 10.374,6.551 H9.6 10.374,6.522 10.374,5.736 10.676,5.434 11.043,5.434 11.346,5.736 11.346,6.522 H9.8
  Bottom Layer w0.206: v3(10.402,7.999) 10.529,7.999 10.962,8.432 10.962,8.602 9.087,10.478 9.087,25.9 8.483,26.504 8.483,26.691 7.687,27.486 7.493,27.486 7.271,27.264 v3(7.124,27.264) 7.09,27.298 6.561,27.298 6.359,27.096 5.912,27.096 5.34,27.669 5.34,28.39 3.271,30.459 3.271,40.378 10.229,47.336 10.229,56.254 18.429,64.454 18.738,64.454 19.382,65.099 H5.52
pads on no net: H5.49 H9. H9.3 H9.9 U2.4

## Polygon pours and split planes (outlines as drawn)
+3.3 on POWER "Top Layer-No Net" (solid, remove dead copper, pour order 6): 0,1 0,66.5 1,67.5 20,67.5 21,66.5 21,1 20,0 1,0
+3.3-FUSED on POWER "POWER-+3.3-FUSED" (solid, pour order 5): 4.5,61.5 15.839,61.5 15.839,17.095 15.744,17 4.5,17
+5 on POWER "POWER-+5" (solid, pour order 4): 20.331,56.393 16.039,56.393 16.039,10.825 5.517,10.825 5.517,9.511 5.625,9.403 17.563,9.403 17.563,54.386 17.588,54.412 20.382,54.412 20.382,56.393
GND on GND "Top Layer-No Net3" (solid, pour order 7): 0,1 0,66.5 1,67.5 20,67.5 21,66.5 21,1 20,0 1,0
GND on Top Layer "Top Layer-No Net1" (solid, pour order 8): 0,1 0,66.5 1,67.5 20,67.5 21,66.5 21,1 20,0 1,0
GND on Bottom Layer "Top Layer-No Net2" (solid, pour order 9): 0,1 0,66.5 1,67.5 20,67.5 21,66.5 21,1 20,0 1,0

## Silkscreen, mask and mechanical layers (free items; w line width, h text height)
Bottom Overlay:
  region: 7692 vertices and 0 holes, not listed, extent 5.318,32.47 15.808,46.048
  text "DEV BOARD" at 5.4,54.1 h2 r180
  text "SAMD21J17A" at 4.7,52.3 h2 r180
  text "AHMSVILLE LABS" at 3.4,48.2 h1.8 r180
Mechanical 1:
  the board outline again, w0.254